# EAGLE board controller_board (EAGLE 9.6.2)
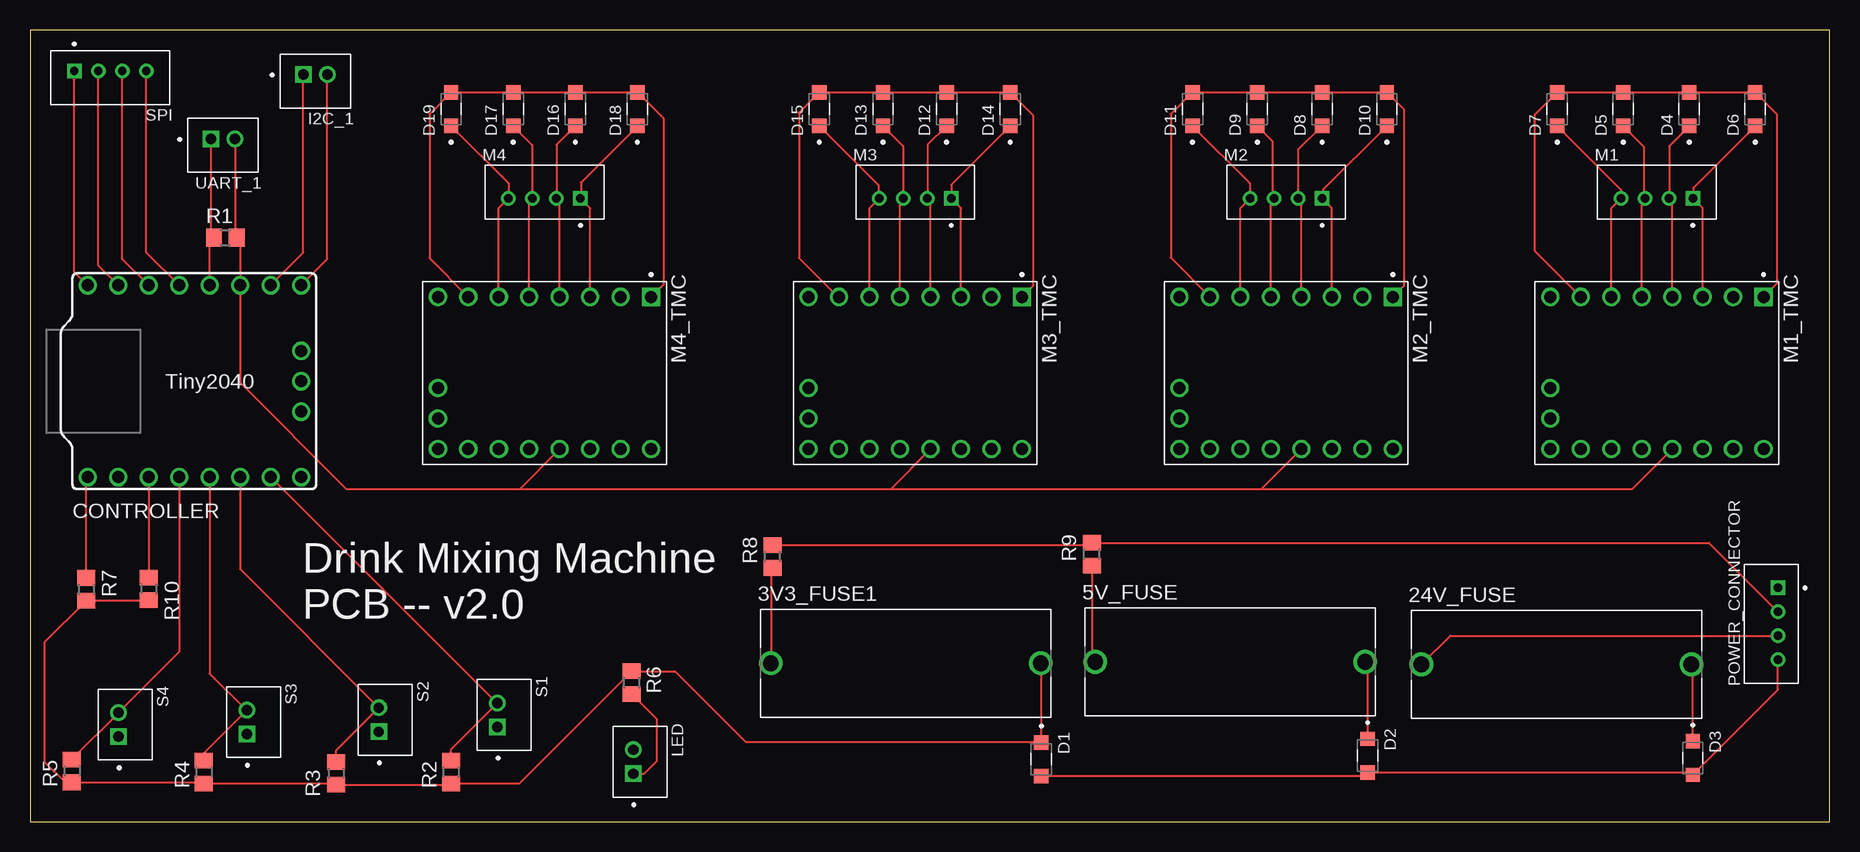
[diagram p0: board, top side]
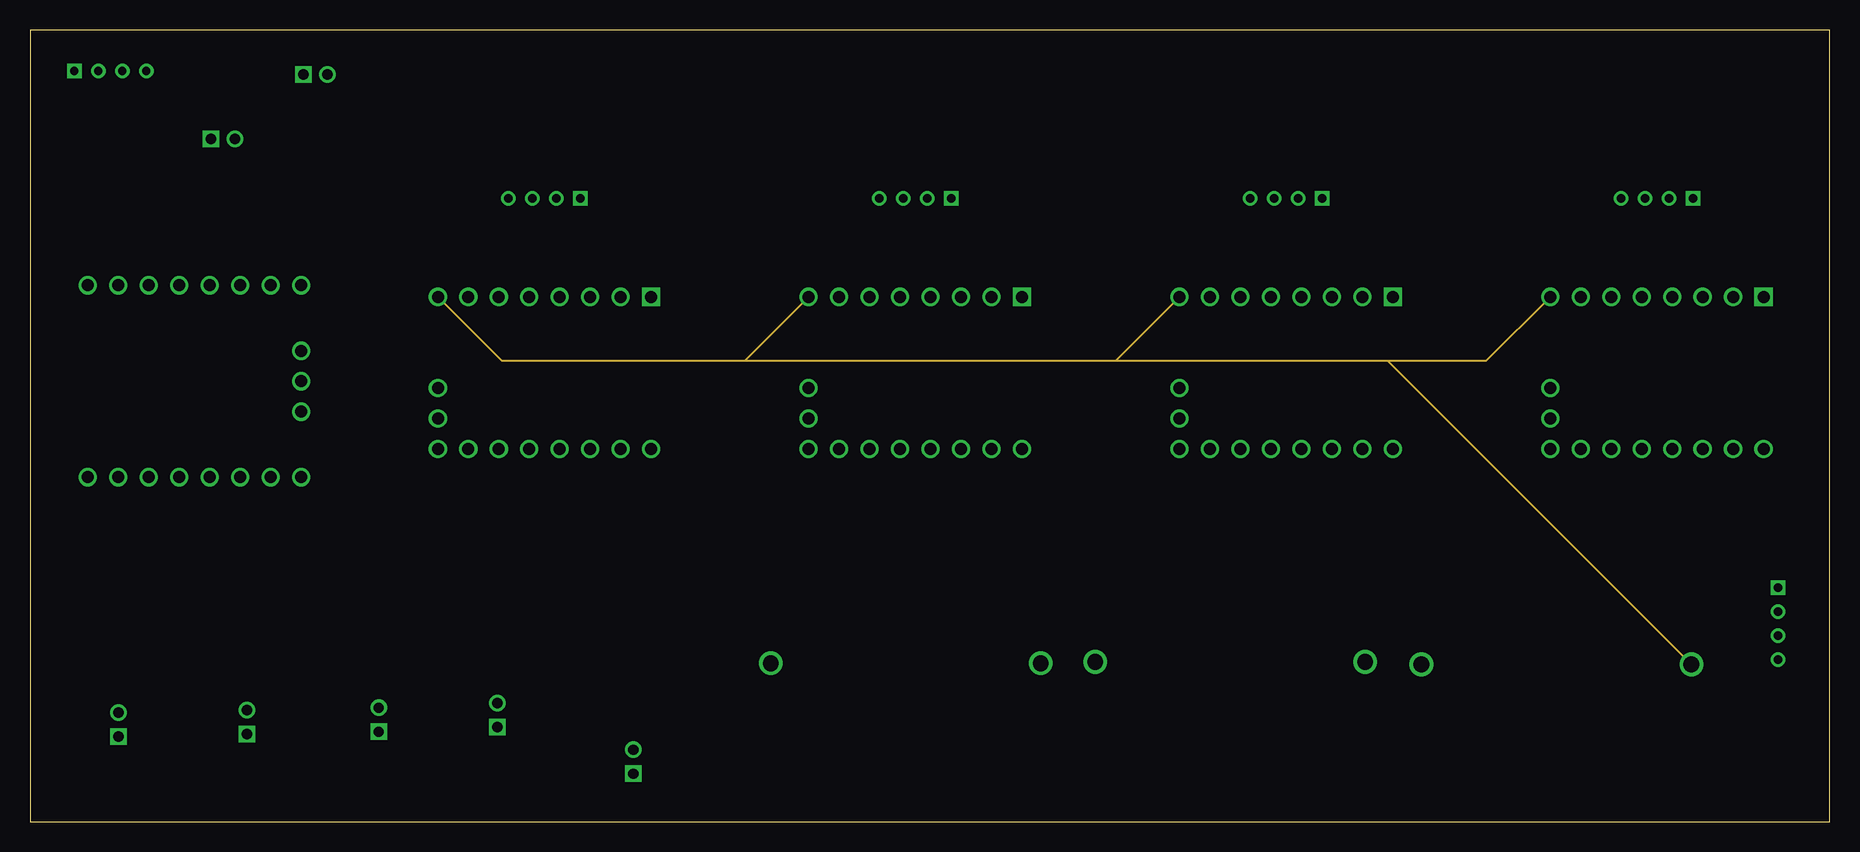
[diagram p1: board, inner layer Route2]
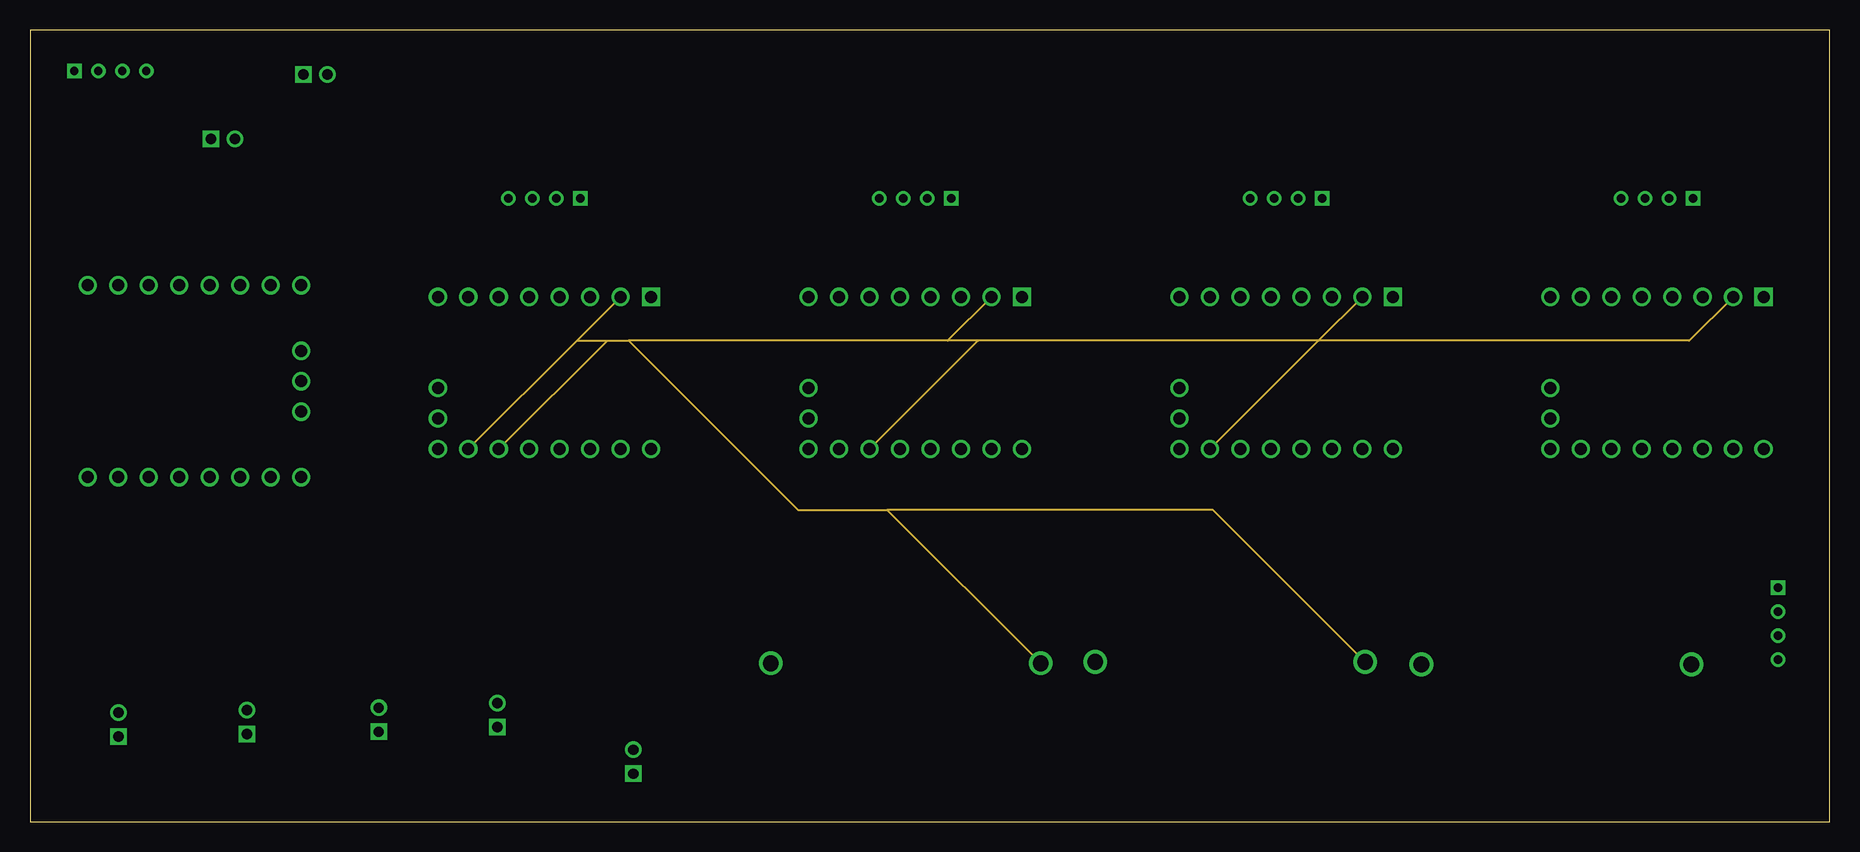
[diagram p2: board, inner layer Route15]
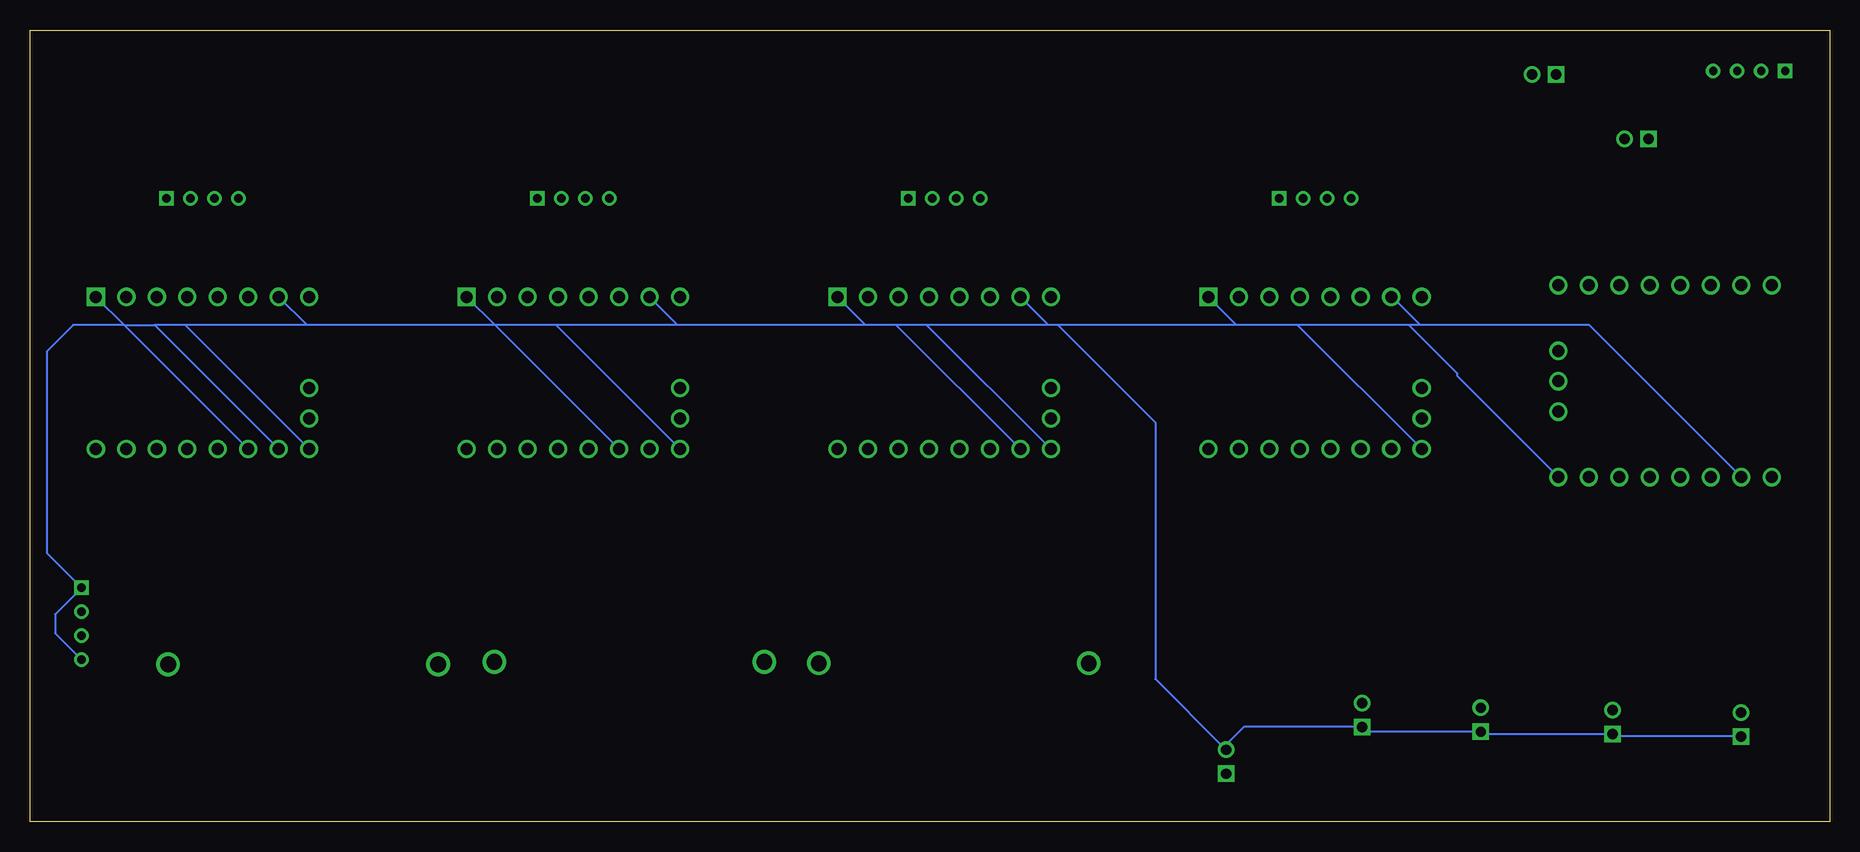
[diagram p3: board, bottom side, seen from below]

Size 150 x 66 mm. Coordinates in mm from the lower left corner, seen from the top.
Outline: 0,0 150,0 150,66 0,66 0,0
Copper layers (1+2*15+16): Top 0.035mm / dielectric 1.5mm / Route2 0.035mm / dielectric 0.15mm / Route15 0.035mm / dielectric 0.2mm / Bottom 0.035mm
Design rules "default *": minimum track width 6mil, minimum drill 0.35mm, track to track 6mil, track to pad 6mil, pad to pad 6mil, via to via 6mil, smd to smd 6mil, copper to edge 40mil, drill to drill 6mil, minimum pad ring 10mil, minimum via ring 8mil, stop-mask expansion 4mil, vias tented up to drill 0mil, thermal gap 10mil

## Footprints (pad centres in the part's own frame; a part is rotated, then mirrored left to right if it is on the bottom)
FUSE_4628 = drill 1.32: 1 -11.25,0; 2 11.25,0
TINY2040_HEADER = drill 1 pad 1.27: 0 1.27,8; 1 3.81,8; 2 6.35,8; 3 8.89,8; 3V3 6.35,-8; 4 11.43,8; 5 13.97,8; 5V 1.27,-8; 6 16.51,8; 7 19.05,8; A0 16.51,-8; A1 13.97,-8; A2 11.43,-8; A3 8.89,-8; GND1 3.81,-8; GND2 19.05,-8; GND3 19.05,0; SWCLK 19.05,-2.54; SWDIO 19.05,2.54
TVS_PTVS3V3S1UR = smd 1.2 x 1.2: A 1.4,0; C -1.4,0
TVS_PTVS5V0S1UR = smd 1.2 x 1.2: A 1.4,0; C -1.4,0
TVS_PTVS24VS1UR = smd 1.2 x 1.2: A 1.4,0; C -1.4,0
JST_B2B-PH-K-S(LF)(SN) = drill 0.86 square: 1 1,-0.55 | drill 0.86: 2 -1,-0.55
JST_B4B-PH-K-S(LF)(SN) = drill 0.7 square: 1 3,-0.55 | drill 0.7: 2 1,-0.55; 3 -1,-0.55; 4 -3,-0.55
MODULE_TMC2209_SILENTSTEPSTICK = drill 1 square: 1 -6.35,8.89 | drill 1: 2 -6.35,6.35; 3 -6.35,3.81; 4 -6.35,1.27; 5 -6.35,-1.27; 6 -6.35,-3.81; 7 -6.35,-6.35; 8 -6.35,-8.89; 9 6.35,8.89; 10 6.35,6.35; 11 6.35,3.81; 12 6.35,1.27; 13 6.35,-1.27; 14 6.35,-3.81; 15 6.35,-6.35; 16 6.35,-8.89; 17 1.27,-8.89; 18 3.81,-8.89
R0805 = smd 1.3 x 1.5: 1 -0.95,0; 2 0.95,0

## Placement (x,y rotation side)
3V3_FUSE1  4628  [FUSE_4628]  73,13.2 0 top
5V_FUSE  4628  [FUSE_4628]  100.04,13.31 0 top
24V_FUSE  4628  [FUSE_4628]  127.24,13.1 0 top
CONTROLLER  TINY2040_HEADER  [TINY2040_HEADER]  3.54,36.71 0 top
D1  PTVS3V3S1UR  [TVS_PTVS3V3S1UR]  84.3,5.2 270 top
D2  PTVS5V0S1UR  [TVS_PTVS5V0S1UR]  111.5,5.5 270 top
D3  PTVS24VS1UR  [TVS_PTVS24VS1UR]  138.6,5.3 270 top
D4  PTVS24VS1UR  [TVS_PTVS24VS1UR]  138.3,59.4 90 top
D5  PTVS24VS1UR  [TVS_PTVS24VS1UR]  132.8,59.4 90 top
D6  PTVS24VS1UR  [TVS_PTVS24VS1UR]  143.8,59.4 90 top
D7  PTVS24VS1UR  [TVS_PTVS24VS1UR]  127.3,59.4 90 top
D8  PTVS24VS1UR  [TVS_PTVS24VS1UR]  107.7,59.4 90 top
D9  PTVS24VS1UR  [TVS_PTVS24VS1UR]  102.3,59.4 90 top
D10  PTVS24VS1UR  [TVS_PTVS24VS1UR]  113.1,59.4 90 top
D11  PTVS24VS1UR  [TVS_PTVS24VS1UR]  96.9,59.4 90 top
D12  PTVS24VS1UR  [TVS_PTVS24VS1UR]  76.4,59.4 90 top
D13  PTVS24VS1UR  [TVS_PTVS24VS1UR]  71.1,59.4 90 top
D14  PTVS24VS1UR  [TVS_PTVS24VS1UR]  81.7,59.4 90 top
D15  PTVS24VS1UR  [TVS_PTVS24VS1UR]  65.8,59.4 90 top
D16  PTVS24VS1UR  [TVS_PTVS24VS1UR]  45.46,59.4 90 top
D17  PTVS24VS1UR  [TVS_PTVS24VS1UR]  40.28,59.4 90 top
D18  PTVS24VS1UR  [TVS_PTVS24VS1UR]  50.63,59.4 90 top
D19  PTVS24VS1UR  [TVS_PTVS24VS1UR]  35.1,59.4 90 top
I2C_1  B2B-PH-K-S(LF)(SN)  [JST_B2B-PH-K-S(LF)(SN)]  23.79,61.74 180 top
LED  B2B-PH-K-S(LF)(SN)  [JST_B2B-PH-K-S(LF)(SN)]  50.84,4.99 270 top
M1  B4B-PH-K-S(LF)(SN)  [JST_B4B-PH-K-S(LF)(SN)]  135.61,52.5 0 top
M1_TMC  TMC2209_SILENTSTEPSTICK  [MODULE_TMC2209_SILENTSTEPSTICK]  135.61,37.4 270 top
M2  B4B-PH-K-S(LF)(SN)  [JST_B4B-PH-K-S(LF)(SN)]  104.7,52.5 0 top
M2_TMC  TMC2209_SILENTSTEPSTICK  [MODULE_TMC2209_SILENTSTEPSTICK]  104.7,37.4 270 top
M3  B4B-PH-K-S(LF)(SN)  [JST_B4B-PH-K-S(LF)(SN)]  73.8,52.5 0 top
M3_TMC  TMC2209_SILENTSTEPSTICK  [MODULE_TMC2209_SILENTSTEPSTICK]  73.8,37.4 270 top
M4  B4B-PH-K-S(LF)(SN)  [JST_B4B-PH-K-S(LF)(SN)]  42.89,52.5 0 top
M4_TMC  TMC2209_SILENTSTEPSTICK  [MODULE_TMC2209_SILENTSTEPSTICK]  42.89,37.4 270 top
POWER_CONNECTOR  B4B-PH-K-S(LF)(SN)  [JST_B4B-PH-K-S(LF)(SN)]  145.15,16.49 90 top
R1  10kR  [R0805]  16.28,48.69 0 top
R2  10kR  [R0805]  35.09,4.12 270 top
R3  10kR  [R0805]  25.51,4.02 270 top
R4  10kR  [R0805]  14.49,4.12 270 top
R5  10kR  [R0805]  3.49,4.22 270 top
R6  100R +-5%  [R0805]  50.16,11.58 90 top
R7  0R  [R0805]  4.68,19.36 270 top
R8  0R  [R0805]  61.9,22.1 90 top
R9  0R  [R0805]  88.5,22.3 90 top
R10  0R  [R0805]  9.9,19.4 270 top
S1  B2B-PH-K-S(LF)(SN)  [JST_B2B-PH-K-S(LF)(SN)]  39.52,8.88 270 top
S2  B2B-PH-K-S(LF)(SN)  [JST_B2B-PH-K-S(LF)(SN)]  29.62,8.48 270 top
S3  B2B-PH-K-S(LF)(SN)  [JST_B2B-PH-K-S(LF)(SN)]  18.63,8.29 270 top
S4  B2B-PH-K-S(LF)(SN)  [JST_B2B-PH-K-S(LF)(SN)]  7.93,8.09 270 top
SPI  B4B-PH-K-S(LF)(SN)  [JST_B4B-PH-K-S(LF)(SN)]  6.69,62.04 180 top
UART_1  B2B-PH-K-S(LF)(SN)  [JST_B2B-PH-K-S(LF)(SN)]  16.09,56.38 180 top

## Library data of the parts
3V3_FUSE1 5V_FUSE 24V_FUSE = 4628; AVAILABILITY: In Stock; DESCRIPTION: 5mm Slim Line Fuse holder; MF: Keystone; MP: 4628; PACKAGE: None; PRICE: None; PURCHASE-URL: https://pricing.snapeda.com/search?q=4628&ref=eda
CONTROLLER = tiny2040_headerd
D1 = PTVS3V3S1UR; AVAILABILITY: In Stock; CHECK_PRICES: https://www.snapeda.com/parts/PTVS3V3S1UR/Nexperia/view-part/?ref=eda; DESCRIPTION: Diode TVS Single Uni-Dir 3.3V 400W Automotive 2-Pin SOD-123W T/R; MF: Nexperia; MP: PTVS3V3S1UR; PACKAGE: None; PRICE: None; SNAPEDA_LINK: https://www.snapeda.com/parts/PTVS3V3S1UR/Nexperia/view-part/?ref=snap
D2 = PTVS5V0S1UR; AVAILABILITY: In Stock; CHECK_PRICES: https://www.snapeda.com/parts/PTVS5V0S1UR/Nexperia/view-part/?ref=eda; DESCRIPTION: 9.2V Clamp 43.5A Ipp Tvs Diode Surface Mount SOD-123W; MF: Nexperia USA; MP: PTVS5V0S1UR; PACKAGE: SOD-123 Nexperia USA; PRICE: None; PURCHASE-URL: https://www.snapeda.com/api/url_track_click_mouser/?unipart_id=2712262&manufacturer=Nexperia USA&part_name=PTVS5V0S1UR&search_term=ptvs5v0s1ur; SNAPEDA_LINK: https://www.snapeda.com/parts/PTVS5V0S1UR/Nexperia/view-part/?ref=snap
D3-D19 = PTVS24VS1UR; AVAILABILITY: In Stock; CHECK_PRICES: https://www.snapeda.com/parts/PTVS24VS1UR/Nexperia/view-part/?ref=eda; DESCRIPTION: TVS Diode Single Uni-Dir 24V 400W Automotive 2-Pin SOD-123W T/R; MF: Nexperia; MP: PTVS24VS1UR; PACKAGE: None; PRICE: None; SNAPEDA_LINK: https://www.snapeda.com/parts/PTVS24VS1UR/Nexperia/view-part/?ref=snap
I2C_1 LED S1-S4 UART_1 = B2B-PH-K-S_LF__SN_; AVAILABILITY: In Stock; DESCRIPTION: Connector Header Through Hole 2 position 0.079 (2.00mm); MF: JST; MP: B2B-PH-K-S (LF)(SN); PACKAGE: None; PRICE: None
M1-M4 POWER_CONNECTOR SPI = B4B-PH-K-S_LF__SN_; AVAILABILITY: In Stock; DESCRIPTION: Connector Header Through Hole 4 position 0.079 (2.00mm); MF: JST Sales; MP: B4B-PH-K-S(LF)(SN); PACKAGE: None; PRICE: None
M1_TMC M2_TMC M3_TMC M4_TMC = TMC2209_SILENTSTEPSTICK; AVAILABILITY: In Stock; DESCRIPTION: TMC2209 Motor Controller/Driver Power Management Evaluation Board; MF: Trinamic Motion Control GmbH; MP: TMC2209 SILENTSTEPSTICK; PACKAGE: None; PRICE: None; PURCHASE-URL: https://pricing.snapeda.com/search?q=TMC2209 SILENTSTEPSTICK&ref=eda
R1-R10 = rcl; SPICEPREFIX: R

## Nets
24V: 24V_FUSE.2 D3.C M1_TMC.8 M2_TMC.8 M3_TMC.8 M4_TMC.8
A0: CONTROLLER.A0 R2.1 S1.2
A1: CONTROLLER.A1 R3.1 S2.2
A2: CONTROLLER.A2 R4.1 S3.2
CS: CONTROLLER.1 SPI.2
GND: CONTROLLER.GND1 CONTROLLER.GND2 D1.A D2.A D3.A D4.A D5.A D6.A D7.A D8.A D9.A D10.A D11.A D12.A D13.A D14.A D15.A D16.A D17.A D18.A D19.A LED.2 M1_TMC.1 M1_TMC.7 M1_TMC.14 M1_TMC.15 M1_TMC.16 M2_TMC.1 M2_TMC.7 M2_TMC.14 M2_TMC.16 M3_TMC.1 M3_TMC.7 M3_TMC.15 M3_TMC.16 M4_TMC.1 M4_TMC.7 M4_TMC.16 POWER_CONNECTOR.1 POWER_CONNECTOR.4 S1.1 S2.1 S3.1 S4.1
LOW_POWER: 3V3_FUSE1.2 5V_FUSE.2 D1.C D2.C M1_TMC.2 M2_TMC.2 M2_TMC.15 M3_TMC.2 M3_TMC.14 M4_TMC.2 M4_TMC.14 M4_TMC.15 R2.2 R3.2 R4.2 R5.2 R6.2 R7.2 R10.2
N$1: POWER_CONNECTOR.2 R8.2 R9.2
N$2: D4.C M1.2 M1_TMC.4
N$3: 5V_FUSE.1 R9.1
N$4: D6.C M1.1 M1_TMC.3
N$5: D8.C M2.2 M2_TMC.4
N$6: D11.C M2.4 M2_TMC.6
N$7: D9.C M2.3 M2_TMC.5
N$8: D10.C M2.1 M2_TMC.3
N$9: D12.C M3.2 M3_TMC.4
N$10: D15.C M3.4 M3_TMC.6
N$11: D13.C M3.3 M3_TMC.5
N$12: D14.C M3.1 M3_TMC.3
N$13: D16.C M4.2 M4_TMC.4
N$14: D19.C M4.4 M4_TMC.6
N$15: D17.C M4.3 M4_TMC.5
N$16: D18.C M4.1 M4_TMC.3
N$17: LED.1 R6.1
N$18: CONTROLLER.5V R7.1
N$19: D7.C M1.4 M1_TMC.6
N$20: CONTROLLER.4 R1.1 UART_1.1
N$21: 3V3_FUSE1.1 R8.1
N$23: CONTROLLER.3V3 R10.1
N$24: CONTROLLER.A3 R5.1 S4.2
N$25: 24V_FUSE.1 POWER_CONNECTOR.3
N$26: D5.C M1.3 M1_TMC.5
RX: CONTROLLER.0 SPI.1
SCK: CONTROLLER.2 SPI.3
SCL: CONTROLLER.7 I2C_1.2
SDA: CONTROLLER.6 I2C_1.1
TX: CONTROLLER.3 SPI.4
UART: CONTROLLER.5 M1_TMC.12 M2_TMC.12 M3_TMC.12 M4_TMC.12 R1.2 UART_1.2

## Tracks (layer width: path | path; a pad name or v marks a point on that pad's centre or on a via)
24V
  Top 0.152: D3.C 138.6,12.99 24V_FUSE.2
  Route2 0.152: M1_TMC.8 121.37,38.4 113.19,38.4 | 90.46,38.4 109.6,38.4 113.19,38.4 | 90.46,38.4 59.56,38.4 | 59.56,38.4 39.35,38.4 M4_TMC.8 | M2_TMC.8 90.46,38.4 | M3_TMC.8 59.56,38.4 | 24V_FUSE.2 113.19,38.4
A0
  Top 0.152: R2.1 35.09,6.01 S1.2 38.88,9.88 CONTROLLER.A0
A1
  Top 0.152: R3.1 25.51,5.93 S2.2 17.51,21.04 CONTROLLER.A1
A2
  Top 0.152: R4.1 14.49,5.7 18.05,9.26 | 18.05,9.26 S3.2 | CONTROLLER.A2 14.97,12.33 18.05,9.26
CS
  Top 0.152: CONTROLLER.1 5.69,46.37 SPI.2
GND
  Top 0.152: D1.A 111.2,3.8 D2.A 138.4,4.1 D3.A 145.7,11 POWER_CONNECTOR.4 | M4_TMC.1 52.8,44.77 52.8,58.63 D18.A D16.A D17.A D19.A 33.3,59 33.3,46.99 M4_TMC.7 | M3_TMC.1 83.6,44.66 83.6,58.9 D14.A D12.A D13.A D15.A 64.1,59.1 64.1,47 67.35,43.75 M3_TMC.7 | M2_TMC.1 114.5,44.66 114.5,59.4 D10.A D8.A D9.A D11.A 95.1,59 95.1,47 M2_TMC.7 | M1_TMC.1 145.6,44.85 145.6,59 D6.A D4.A D5.A D7.A 125.4,58.9 125.4,47.6 M1_TMC.7
  Bottom 0.152: CONTROLLER.GND1 20.04,41.4 34.1,41.4 | 34.1,41.4 35.08,41.4 | 35.08,41.4 44.35,41.4 | 44.35,41.4 49.43,41.4 | 49.43,41.4 64.3,41.4 | 64.3,41.4 65.1,41.4 | 65.1,41.4 75.26,41.4 | 75.26,41.4 77.8,41.4 | 77.8,41.4 80.34,41.4 | 80.34,41.4 96,41.4 | 96,41.4 106.16,41.4 | 106.16,41.4 111.24,41.4 | 111.24,41.4 126.91,41.4 | 126.91,41.4 137.07,41.4 | M1_TMC.1 142.15,41.4 | 142.15,41.4 139.61,41.4 | M1_TMC.15 139.61,41.4 | M1_TMC.16 137.07,41.4 | 137.07,41.4 139.61,41.4 | CONTROLLER.GND2 31.02,37.14 31.02,37.34 35.08,41.4 | LED.2 50.5,6.2 | 50.5,6.2 56.19,11.88 56.19,33.29 64.3,41.4 | M1_TMC.14 142.15,41.4 | 142.15,41.4 146.4,41.4 148.6,39.2 148.6,22.39 POWER_CONNECTOR.1 147.9,17.29 147.9,15.69 POWER_CONNECTOR.4 | S4.1 17.88,7.08 S3.1 28.87,7.29 S2.1 38.57,7.49 S1.1 48.81,7.88 50.5,6.2 | 34.1,41.4 36.45,43.75 M4_TMC.7 | M4_TMC.16 44.35,41.4 | M3_TMC.16 75.26,41.4 | M3_TMC.15 77.8,41.4 | M2_TMC.16 106.16,41.4 | M2_TMC.14 111.24,41.4 | M2_TMC.7 96,41.4 | M3_TMC.1 80.34,41.4 | M3_TMC.7 65.1,41.4 | M4_TMC.1 49.43,41.4 | M2_TMC.1 111.24,41.4 | M1_TMC.7 126.91,41.4
LOW_POWER
  Top 0.152: R10.2 9.86,18.41 R7.2 1.2,14.93 1.2,5 2.93,3.27 R5.2 14.39,3.27 R4.2 25.93,3.17 26.1,3 25.58,3 R3.2 34.99,3.07 R2.2 40.8,3.17 R6.2 53.76,12.53 59.64,6.65 84.25,6.65 | 3V3_FUSE1.2 84.25,6.65 | 84.25,6.65 D1.C | D2.C 111.5,13.1 5V_FUSE.2
  Route15 0.152: M1_TMC.2 138.31,40.1 107.4,40.1 | 107.4,40.1 79.04,40.1 | 79.04,40.1 76.5,40.1 | 76.5,40.1 49.9,40.1 | M2_TMC.2 107.4,40.1 | 71.45,26 3V3_FUSE1.2 | 71.45,26 64,26 49.9,40.1 | 5V_FUSE.2 98.6,26 71.45,26 | 45.59,40.1 M4_TMC.2 | M2_TMC.15 107.4,40.1 | M3_TMC.2 76.5,40.1 | M3_TMC.14 79.04,40.1 | 45.59,40.1 48.13,40.1 | 49.9,40.1 49.2,40.1 48.13,40.1 | M4_TMC.15 45.59,40.1 | M4_TMC.14 48.13,40.1
N$1
  Top 0.152: R8.2 88.3,23.05 R9.2 139.94,23.25 POWER_CONNECTOR.2
N$2
  Top 0.152: M1_TMC.4 136.88,51.68 136.63,51.93 | 136.63,51.93 M1.2 | D4.C 136.63,56.33 136.63,51.93
N$3
  Top 0.152: R9.1 88.5,13.6 5V_FUSE.1
N$4
  Top 0.152: M1_TMC.3 139.42,51.14 138.63,51.93 | 138.63,51.93 M1.1 | D6.C 138.63,52.83 138.63,51.93
N$5
  Top 0.152: M2_TMC.4 105.97,51.68 M2.2 105.7,56 D8.C
N$6
  Top 0.152: M2_TMC.6 100.89,51.14 101.68,51.92 | 101.68,51.92 M2.4 | D11.C 101.68,53.22 101.68,51.92
N$7
  Top 0.152: M2_TMC.5 103.43,51.68 103.58,51.82 | 103.58,51.82 M2.3 | D9.C 103.58,56.72 103.58,51.82
N$8
  Top 0.152: M2_TMC.3 108.51,51.14 107.78,51.88 | 107.78,51.88 M2.1 | D10.C 107.78,52.68 107.78,51.88
N$9
  Top 0.152: M3_TMC.4 75.07,51.68 74.82,51.92 | 74.82,51.92 M3.2 | D12.C 74.82,56.42 74.82,51.92
N$10
  Top 0.152: M3_TMC.6 69.99,51.14 70.72,51.88 | 70.72,51.88 M3.4 | D15.C 70.72,53.08 70.72,51.88
N$11
  Top 0.152: M3_TMC.5 72.53,51.68 72.77,51.93 | 72.77,51.93 M3.3 | D13.C 72.77,56.33 72.77,51.93
N$12
  Top 0.152: M3_TMC.3 77.61,51.14 M3.1 76.8,53.1 D14.C
N$13
  Top 0.152: M4_TMC.4 44.16,51.68 M4.2 43.89,56.43 D16.C
N$14
  Top 0.152: M4_TMC.6 39.08,51.14 M4.4 39.89,53.21 D19.C
N$15
  Top 0.152: M4_TMC.5 41.62,51.68 41.87,51.93 | 41.87,51.93 M4.3 | D17.C 41.87,56.41 41.87,51.93
N$16
  Top 0.152: M4_TMC.3 46.7,51.14 45.92,51.92 | 45.92,51.92 M4.1 | D18.C 45.92,53.29 45.92,51.92
N$17
  Top 0.152: LED.1 51.18,3.98 52.24,5.04 52.24,8.55 R6.1
N$18
  Top 0.152: R7.1 4.68,28.58 CONTROLLER.5V
N$19
  Top 0.152: M1_TMC.6 131.8,51.14 M1.4 132.61,52.69 D7.C
N$20
  Top 0.152: CONTROLLER.4 14.97,48.33 R1.1 15.09,48.93 UART_1.1
N$21
  Top 0.152: R8.1 61.75,21 3V3_FUSE1.1
N$23
  Top 0.152: CONTROLLER.3V3 R10.1
N$24
  Top 0.152: R5.1 7.38,9.06 S4.2 12.43,14.13 CONTROLLER.A3
N$25
  Top 0.152: 24V_FUSE.1 118.38,15.49 POWER_CONNECTOR.3
N$26
  Top 0.152: M1_TMC.5 134.34,51.68 134.53,51.87 | 134.53,51.87 M1.3 | D5.C 134.53,56.27 134.53,51.87
RX
  Top 0.152: CONTROLLER.0 3.69,45.83 SPI.1
SCK
  Top 0.152: CONTROLLER.2 7.69,46.91 SPI.3
SCL
  Top 0.152: CONTROLLER.7 24.79,46.91 I2C_1.2
SDA
  Top 0.152: CONTROLLER.6 22.79,47.45 I2C_1.1
TX
  Top 0.152: CONTROLLER.3 9.69,47.45 SPI.4
UART
  Top 0.152: UART_1.2 17.09,48.83 R1.2 17.53,48.39 17.53,44.73 CONTROLLER.5 17.51,36.59 26.4,27.7 40.81,27.7 | 102.62,27.7 133.53,27.7 M1_TMC.12 | 71.72,27.7 101.5,27.7 102.62,27.7 | 71.72,27.7 40.81,27.7 | M4_TMC.12 40.81,27.7 | M3_TMC.12 71.72,27.7 | M2_TMC.12 102.62,27.7

## Text on the board
tNames: Drink Mixing Machine / PCB -- v2.0